# Altium PCB HallFieldMeter.PcbDoc
Units mm, origin at the board's own origin, x right, y up, seen from the top; angles counter-clockwise.
Board outline 155 x 25 mm, 4 copper layers (Top Layer, Signal Layer 1, Signal Layer 2, Bottom Layer), stack 0.778 mm thick; 4 components, 10 nets, 38 pads, 1 vias.
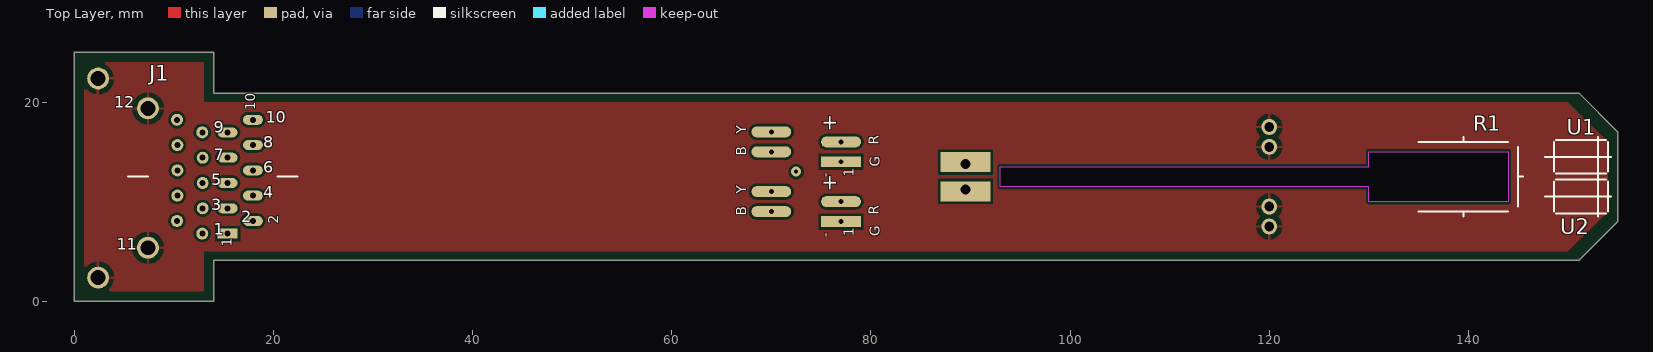
[diagram p0: Top Layer view]
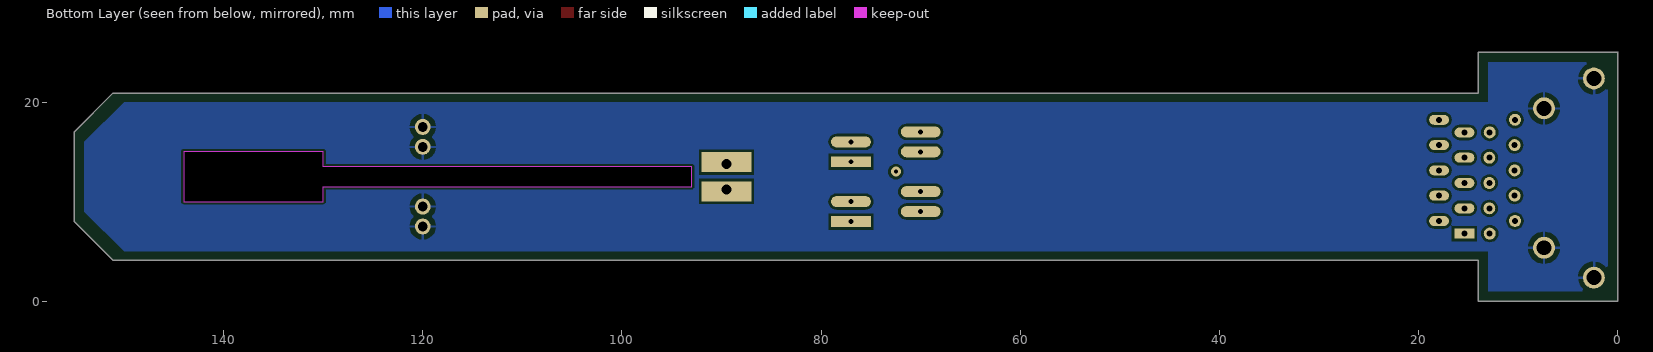
[diagram p1: Bottom Layer view, seen from below]
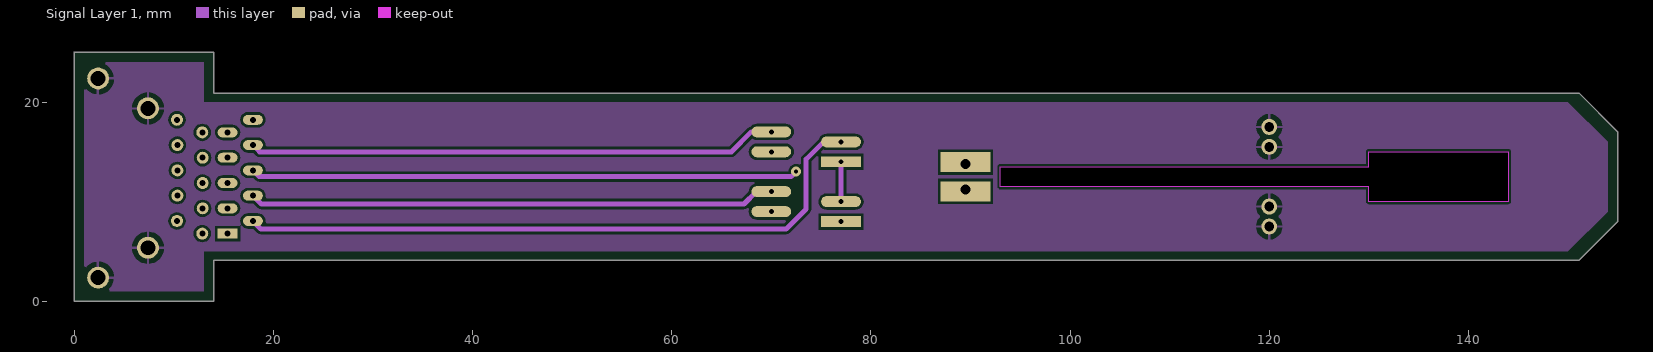
[diagram p2: Signal Layer 1]
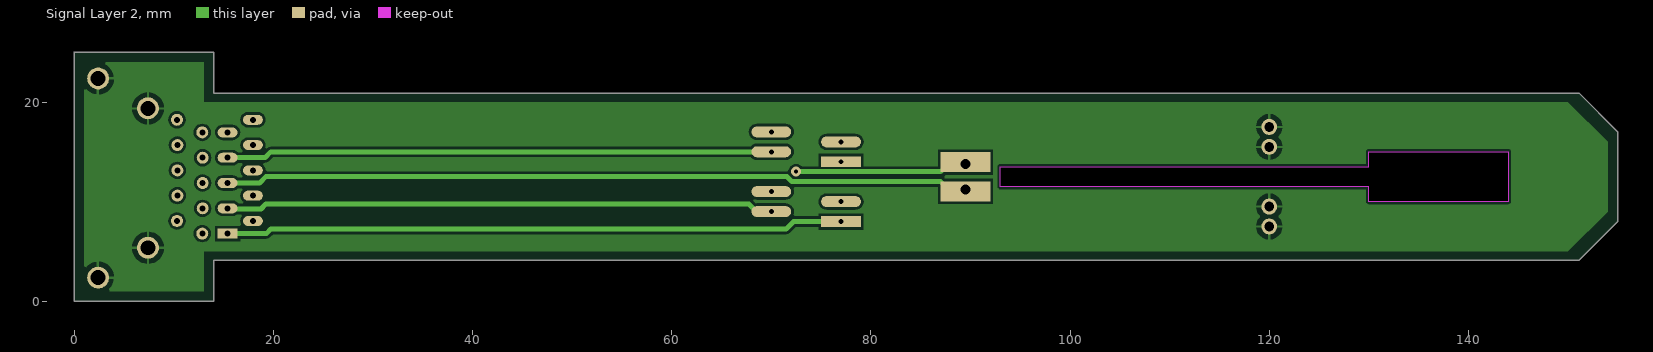
[diagram p3: Signal Layer 2]

## Layer stack, top to bottom
Top Solder: solder mask 0.0102, Solder Resist, Dk 3.5
Top Layer: signal copper 0.0356
Dielectric 1: core 0.254, FR-4, Dk 4.2
Signal Layer 1: signal copper 0.036
Dielectric 3: prepreg 0.127, Dk 4.2
Signal Layer 2: signal copper 0.036
Dielectric 2: core 0.254, Dk 4.2
Bottom Layer: signal copper 0.0356
Bottom Solder: solder mask 0.0102, Solder Resist, Dk 3.5

## Board outline
0,0 14,0 14,4.1 151.1,4.1 155,8 155,17 151.1,20.9 14,20.9 14,25 0,25
cut-out: 93,13.5 130,13.5 130,15 144,15 144,10 130,10 130,11.5 93,11.5

## Design rules (kind name [scope] priority, off if disabled: settings)
Clearance MultyIn2 [OnLayer('Signal Layer 2') vs OnLayer('Multi-Layer')] p1: gap=0.254 ignorepadtopadclearanceinfootprint=TRUE except(0: Arc-Hole Track-Hole SMDPad-Hole THPad-Hole Via-Hole Fill-Hole Poly-Hole Region-Hole Text-Hole; 0.15: Arc-Arc Arc-Track Arc-THPad Track-Track Track-THPad SMDPad-SMDPad; 0.2: Arc-SMDPad Track-SMDPad)
Clearance MiltyIn1 [OnLayer('Signal Layer 1') vs OnLayer('Multi-Layer')] p2: gap=0.254 ignorepadtopadclearanceinfootprint=TRUE except(0: Arc-Hole Track-Hole SMDPad-Hole THPad-Hole Via-Hole Fill-Hole Poly-Hole Region-Hole Text-Hole; 0.15: Arc-Arc Arc-Track Arc-THPad Track-Track Track-THPad SMDPad-SMDPad; 0.2: Arc-SMDPad Track-SMDPad)
Clearance int2 [OnLayer('Signal Layer 2') vs OnLayer('Signal Layer 2')] p3: gap=0.254 ignorepadtopadclearanceinfootprint=TRUE except(0: Arc-Hole Track-Hole SMDPad-Hole THPad-Hole Via-Hole Fill-Hole Poly-Hole Region-Hole Text-Hole; 0.15: Arc-Arc Arc-Track Arc-THPad Track-Track Track-THPad SMDPad-SMDPad; 0.2: Arc-SMDPad Track-SMDPad)
Clearance AllLayers [OnLayer('Signal Layer 1') vs OnLayer('Signal Layer 1')] p4: gap=0.254 ignorepadtopadclearanceinfootprint=TRUE except(0: Arc-Hole Track-Hole SMDPad-Hole THPad-Hole Via-Hole Fill-Hole Poly-Hole Region-Hole Text-Hole; 0.15: Arc-Arc Arc-Track Arc-THPad Track-Track Track-THPad SMDPad-SMDPad; 0.2: Arc-SMDPad Track-SMDPad)
Clearance TopOverlay [OnLayer('Top Overlay') vs OnLayer('Top Layer')] p5: gap=0 ignorepadtopadclearanceinfootprint=TRUE except(0.254: Arc-Text Track-Text SMDPad-Text Via-Text Text-Text Text-Hole)
Clearance MultyBot [OnLayer('Bottom Layer') vs OnLayer('Multi-Layer')] p6: gap=0.254 ignorepadtopadclearanceinfootprint=TRUE except(0: Arc-Hole Track-Hole SMDPad-Hole THPad-Hole Via-Hole Fill-Hole Poly-Hole Region-Hole Text-Hole; 0.15: Arc-Arc Arc-Track Track-Track SMDPad-SMDPad; 0.2: Arc-SMDPad Arc-THPad Track-SMDPad Track-THPad)
Clearance MultyTop [OnLayer('Multi-Layer')] p7: gap=0.254 ignorepadtopadclearanceinfootprint=TRUE except(0: Arc-Hole Track-Hole SMDPad-Hole THPad-Hole Via-Hole Fill-Hole Poly-Hole Region-Hole Text-Hole; 0.15: Arc-SMDPad Arc-THPad Track-SMDPad Track-THPad SMDPad-SMDPad; 0.2: Arc-Arc Arc-Track Track-Track)
Clearance MulyMulty [OnLayer('Multi-Layer') vs OnLayer('Multi-Layer')] p8: gap=0.254 ignorepadtopadclearanceinfootprint=TRUE except(0: Arc-Hole Track-Hole SMDPad-Hole THPad-Hole Via-Hole Fill-Hole Poly-Hole Region-Hole Text-Hole; 0.2: Arc-Arc Arc-Track Arc-SMDPad Track-Track Track-SMDPad SMDPad-SMDPad)
Clearance TopTop [OnLayer('Top Layer') vs OnLayer('Top Layer')] p9: gap=0.254 ignorepadtopadclearanceinfootprint=TRUE except(0: Arc-Hole Track-Hole SMDPad-Hole THPad-Hole Via-Hole Fill-Hole Poly-Hole Region-Hole Text-Hole; 0.15: Arc-SMDPad Arc-THPad Track-SMDPad Track-THPad; 0.2: Arc-Arc Arc-Track Track-Track SMDPad-SMDPad; 0.5: THPad-Fill THPad-Poly THPad-Region)
Clearance BotBot [OnLayer('Bottom Layer') vs OnLayer('Bottom Layer')] p10: gap=0.254 ignorepadtopadclearanceinfootprint=TRUE except(0: Arc-Hole Track-Hole SMDPad-Hole THPad-Hole Via-Hole Fill-Hole Poly-Hole Region-Hole Text-Hole; 0.15: Arc-Arc Arc-Track Arc-THPad Track-Track Track-THPad SMDPad-SMDPad; 0.2: Arc-SMDPad Track-SMDPad; 0.5: THPad-Fill THPad-Poly THPad-Region)
Height [All] p1: minheight=0 maxheight=500 prefheight=12.7
HoleSize [All] p1: absolutevalues=TRUE maxlimit=10 minlimit=0.025 maxpercent=80.000 minpercent=20.000
PlaneConnect [All] p1: pad.planeconnectstyle=Relief pad.reliefexpansion=0.508 pad.reliefentries=4 pad.reliefconductorwidth=0.254 pad.reliefairgap=0.254 via.planeconnectstyle=Direct via.reliefexpansion=0.508 via.reliefentries=4 via.reliefconductorwidth=0.254 via.reliefairgap=0.254
PolygonConnect [All] p1: thpad.connectstyle=Relief thpad.reliefconductorwidth=0.254 thpad.reliefentries=4 thpad.polygonreliefangle="90 Angle" thpad.airgapwidth=0.5 smdpad.connectstyle=Relief smdpad.reliefconductorwidth=0.254 smdpad.reliefentries=4 smdpad.polygonreliefangle="90 Angle" smdpad.airgapwidth=0.5 via.connectstyle=Direct via.reliefconductorwidth=0.254 via.reliefentries=4 via.polygonreliefangle="90 Angle" via.airgapwidth=0.254
RoomDefinition BPC.Probe [InComponentClass('BPC.Probe')] p1: confinementstyle=ConfineIn formatcopy=TRUE lockcomponents=FALSE outline 0,0 214,0 214,27 0,27
RoutingVias [All] p1: holewidth=0.4 width=1 viastyle="Through Hole" minholewidth=0.3 minwidth=0.9 maxholewidth=0.4 maxwidth=1
SolderMaskExpansion [All] p1: expansion=0.102
Width [All] p1: maxlimit=3 minlimit=0.15 preferedwidth=0.254 toplayer_prefwidth=0.25 midlayer1_minwidth=0.25 midlayer1_prefwidth=0.25 midlayer2_minwidth=0.25 midlayer2_prefwidth=0.25 bottomlayer_minwidth=0.2 minimp=50.000000 maximp=50.000000 favimp=50.000000
27 further rules are at their usual default settings.

## Components (designator, comment, footprint, x,y, rotation, side; value= is the part's Value field where it differs from the comment)
J1 "PCB12Conn" PCB12CONN 21.5,12.5 r90 top
R1 "HRTS-5760-B-U-0-12" HRTS-5760-B-U-0-12 139.5,12.5 r90 top value=1000 (schematic designator U3)
U1 "HE244T" HE244T_LEFT 153,14.5 r90 top value=2mA
U2 "HE244T" HE244T_RIGHT 153,10.5 r90 top value=2mA

## Footprints (in the part's own frame and the unit in brackets; to place one, negate y for a bottom-side part, rotate by r counter-clockwise, add the part's x,y. Pads: shape width x height; smd on the part's side, far side on the other; paste and mask are expansions set on the pad)
HE244T_LEFT [mm] "he244t"
  round 1.6 hole 1: 0(1,33) 0(3,33)
  rect 1.1x4 hole 0.5: 1(-0.5,76)
  oval 1.1x4 hole 0.5: 2(1.5,76) 3(0.5,83) 4(2.5,83)
  silkscreen extent -2,-1.3 2,5.3, body extent -1.5,-0.8 1.5,4.2, height 0.8
HE244T_RIGHT [mm] "he244t"
  round 1.6 hole 1: 0(-3,33) 0(-1,33)
  rect 1.1x4 hole 0.5: 1(-2.5,76)
  oval 1.1x4 hole 0.5: 2(-0.5,76) 3(-1.5,83) 4(0.5,83)
  silkscreen extent -2,-1.3 2,5.3, body extent -1.5,-0.8 1.5,4.2, height 0.8
HRTS-5760-B-U-0-12 [mm] "he244t"
  rect 2x5 hole 1 copper offset -0.2,0: 1(-1.27,50)
  rect 2x5 hole 1 copper offset 0.2,0: 2(1.27,50)
  silkscreen extent -4,-6 4,4.5, body extent -2.5,-4 2.5,4, height 0.5
PCB12CONN [mm] "3M, 3000 Series, 24 Contacts - Pitch 2.54mm - Straight Four-Wall Header (Black) With Short Roll Pin Latch/Ejectors"
  round 2.2 hole 1.5: 0(-10.135,19.1) 0(9.865,19.1) 11(-7.135,14.1) 12(6.865,14.1)
  round 1.2 hole 0.6 unplated: 0(-5.715,8.64) 0(-4.445,11.18) 0(-3.175,8.6) 0(-1.905,11.14) 0(-0.635,8.6) 0(0.635,11.14) 0(1.905,8.6) 0(3.175,11.14) 0(4.445,8.64) 0(5.715,11.18)
  rect 1x2 hole 0.6: 1(-5.715,6.1)
  oval 1x2 hole 0.6: 2(-4.445,3.56) 3(-3.175,6.1) 4(-1.905,3.56) 5(-0.635,6.1) 6(0.635,3.56) 7(1.905,6.1) 8(3.175,3.56) 9(4.445,6.1) 10(5.715,3.56)
  silkscreen extent 0,-0.9 0,16.1

## Part data
J1: library part PCB12_Conn, "PCB Connector 12 pins", Device=PCB12Conn, Pkg=PCB12Conn, Price=0, SMD Solders=0, Solder Option=RM, THD Solders=14, Vendor=PSElectro
R1: "Pt1000 Temperature Sensors", Device=HRTS-5760-B-U-0-12, Name to order=HRTS-5760-B-U-0-12, Pkg=HRTS-5760-B-U-0-12, Price=16000, SMD Solders=0, Solder Option=RM, THD Solders=2, Vendor=HoneyWell
U1 U2: "HE244 Series Analog Hall Sensor", Device=HE244T, Pkg=团244T, Price=20000, SMD Solders=0, Solder Option=RM, THD Solders=4, Vendor="Advanced Sensor Tech."

## Via types
v1: diameter 1, hole 0.4, Top Layer to Bottom Layer, tented both sides, 1 vias

## Nets (pads, with @x,y where several pads share a name; then routed paths per layer and width w, separated by ;. In a path a pad name is that pad's centre, name@x,y a point inside that pad or via, vN(x,y) a via of type N, cw(c..) or ccw(c..) an arc to the next point about the centre after c; other vN are vias at no path point)
GND: J1.0@2.4,2.365 J1.0@2.4,22.365 J1.11 J1.12 U1.0 U2.0
iMinus: J1.1 U2.1 | length 62.1
  Signal Layer 2 w0.5: J1.1 19.285,6.785 19.75,7.25 71.5,7.25 72.25,8 U2.1
iPlus: J1.2 U1.2 | length 65.9
  Signal Layer 1 w0.5: J1.2 18.745,7.25 71.5,7.25 73.504,9.254 73.504,14.254 75.25,16 U1.2
Left+: J1.8 U1.4 | length 53.2
  Signal Layer 1 w0.5: J1.8 18.615,15 66,15 68,17 U1.4
Left-: J1.7 U1.3 | length 54.8
  Signal Layer 2 w0.5: J1.7 19.155,14.405 19.75,15 U1.3
NetJ1_5: J1.5 R1.1 | length 74.9
  Signal Layer 2 w0.5: J1.5 18.615,11.865 19.25,12.5 71.58,12.5 72.084,11.996 87.004,11.996 87.77,11.23 R1.1
NetJ1_6: J1.6 R1.2 | length 72.3
  Signal Layer 1 w0.5: J1.6 18.575,12.5 72,12.5 v1(72.5,13)
  Signal Layer 2 w0.5: v1(72.5,13) 87,13 87.77,13.77 R1.2
NetU1_1: U1.1 U2.2 | length 4
  Signal Layer 1 w0.5: U2.2 U1.1
Right+: J1.4 U2.4 | length 52.9
  Signal Layer 1 w0.5: J1.4 18.785,9.75 67.25,9.75 68.5,11 U2.4
Right-: J1.3 U2.3 | length 55.1
  Signal Layer 2 w0.5: J1.3 15.475,9.25 18.75,9.25 19.25,9.75 67.75,9.75 68.5,9 U2.3
pads on no net: J1.0@10.32,8.055 J1.0@10.32,18.215 J1.0@10.36,10.595 J1.0@10.36,13.135 J1.0@10.36,15.675 J1.0@12.9,9.325 J1.0@12.9,11.865 J1.0@12.9,14.405 J1.0@12.86,6.785 J1.0@12.86,16.945 J1.9 J1.10

## Polygon pours and split planes (outlines as drawn)
GND on Signal Layer 1 "GND_L02_P014" (solid, remove dead copper, pour order 14): 1,24 13,24 13,20 150,20 154,16 154,9 150,5 13,5 13,1 1,1
no net on Signal Layer 1 "NONET_L-01_P-001" (solid, remove dead copper, pour order 0): 9,1
GND on Top Layer "NONET_L-01_P-001" (solid, remove dead copper, pour order 10): 1,24 13,24 13,20 150,20 154,16 154,9 150,5 13,5 13,1 1,1
GND on Bottom Layer "GND_L04_P012" (solid, remove dead copper, pour order 12): 1,24 13,24 13,20 150,20 154,16 154,9 150,5 13,5 13,1 1,1
GND on Signal Layer 2 "GND_L03_P016" (solid, remove dead copper, pour order 16): 1,24 13,24 13,20 150,20 154,16 154,9 150,5 13,5 13,1 1,1

## Silkscreen, mask and mechanical layers (free items; w line width, h text height)
Top Overlay:
  text "12" at 4,19 h2
  text "10" at 19.25,17.5 h2
  text "9" at 14,16.5 h2
  text "8" at 19,15 h2
  text "7" at 14,13.75 h2
  text "6" at 19,12.5 h2
  text "5" at 13.75,11.25 h2
  text "4" at 19,10 h2
  text "3" at 13.75,8.75 h2
  text "2" at 16.75,7.5 h2
  text "1" at 14,6.25 h2
  text "11" at 4.25,4.75 h2
Top Solder:
  text "BPC HALL PROBE V0 03.25" at 19.963,6.736 h4
Bottom Solder:
  text "BPC HALL PROBE V0 03.25" at 67,7 h4
Mechanical 3:
  lines w0.1: -110,-40.5 -110,-41 ; -110,-40 -110,-41 ; -110,53 -110,-41
  lines w0.3: -110,53 -110,-41 -55,-41 -55,53
Mechanical 16:
  lines w0.2: 46,12.5 83.5,12.5
  lines w0.4: 14,20 151,20 ; 25,5 151,5 ; 25,6 152,6 ; 25,19 152,19
Mechanical 17:
  lines w0.1: 93,11.5 130,11.5 130,10 131,10 144,10 144,15 131,15 130,15 130,13.5 93,13.5 93,11.5
  lines w0.4: 25,4 25,4 ; 25,4 25,4 ; 0,0 14,0 14,4.1 151.1,4.1 155,8 155,17 151.1,20.9 14,20.9 14,25 0,25 0,25 0,0

## Dimensions
152,19 to 152,6 on Mechanical 16
17.94,18.215 to 14,20.9 on Mechanical 16
15.4,6.785 to 14,4.1 on Mechanical 16
151.1,4.1 to 155,8 on Mechanical 16
151.1,20.9 to 155,17 on Mechanical 16
155,17 to 155,8 on Mechanical 16
151.1,20.9 to 151.1,4.1 on Mechanical 16
155,17 to 151.1,20.9 on Mechanical 16
155,8 to 151,4.1 on Mechanical 16
0,25 to 0,0 on Mechanical 16
0,25 to 14,25 on Mechanical 16
0,0 to 155,6 on Mechanical 16

## Text inside footprints (layer, text, board x,y; h text height)
J1: Top Overlay "1" at 15.8,5.465 h1 r90; Top Overlay "10" at 18.2,19.165 h1 r90; Top Overlay "2" at 20.5,7.765 h1 r90
U1: Top Overlay "+" at 76.5,17 h1.52 r90; Top Overlay "-" at 76.175,12.425 h1.52 r90; Top Overlay "G" at 80.9,13.5 h1 r90; Top Overlay "Y" at 67.5,16.8 h1 r90; Top Overlay "B" at 67.5,14.6 h1 r90; Top Overlay "R" at 80.8,15.7 h1 r90; Top Overlay "1" at 78.3,12.5 h1 r90
U2: Top Overlay "+" at 76.5,11 h1.52 r90; Top Overlay "-" at 76.175,6.425 h1.52 r90; Top Overlay "G" at 80.9,6.5 h1 r90; Top Overlay "Y" at 67.5,10.8 h1 r90; Top Overlay "B" at 67.5,8.6 h1 r90; Top Overlay "R" at 80.8,8.7 h1 r90; Top Overlay "1" at 78.3,6.5 h1 r90